# EAGLE board rbroce_board (EAGLE 9.5.2)
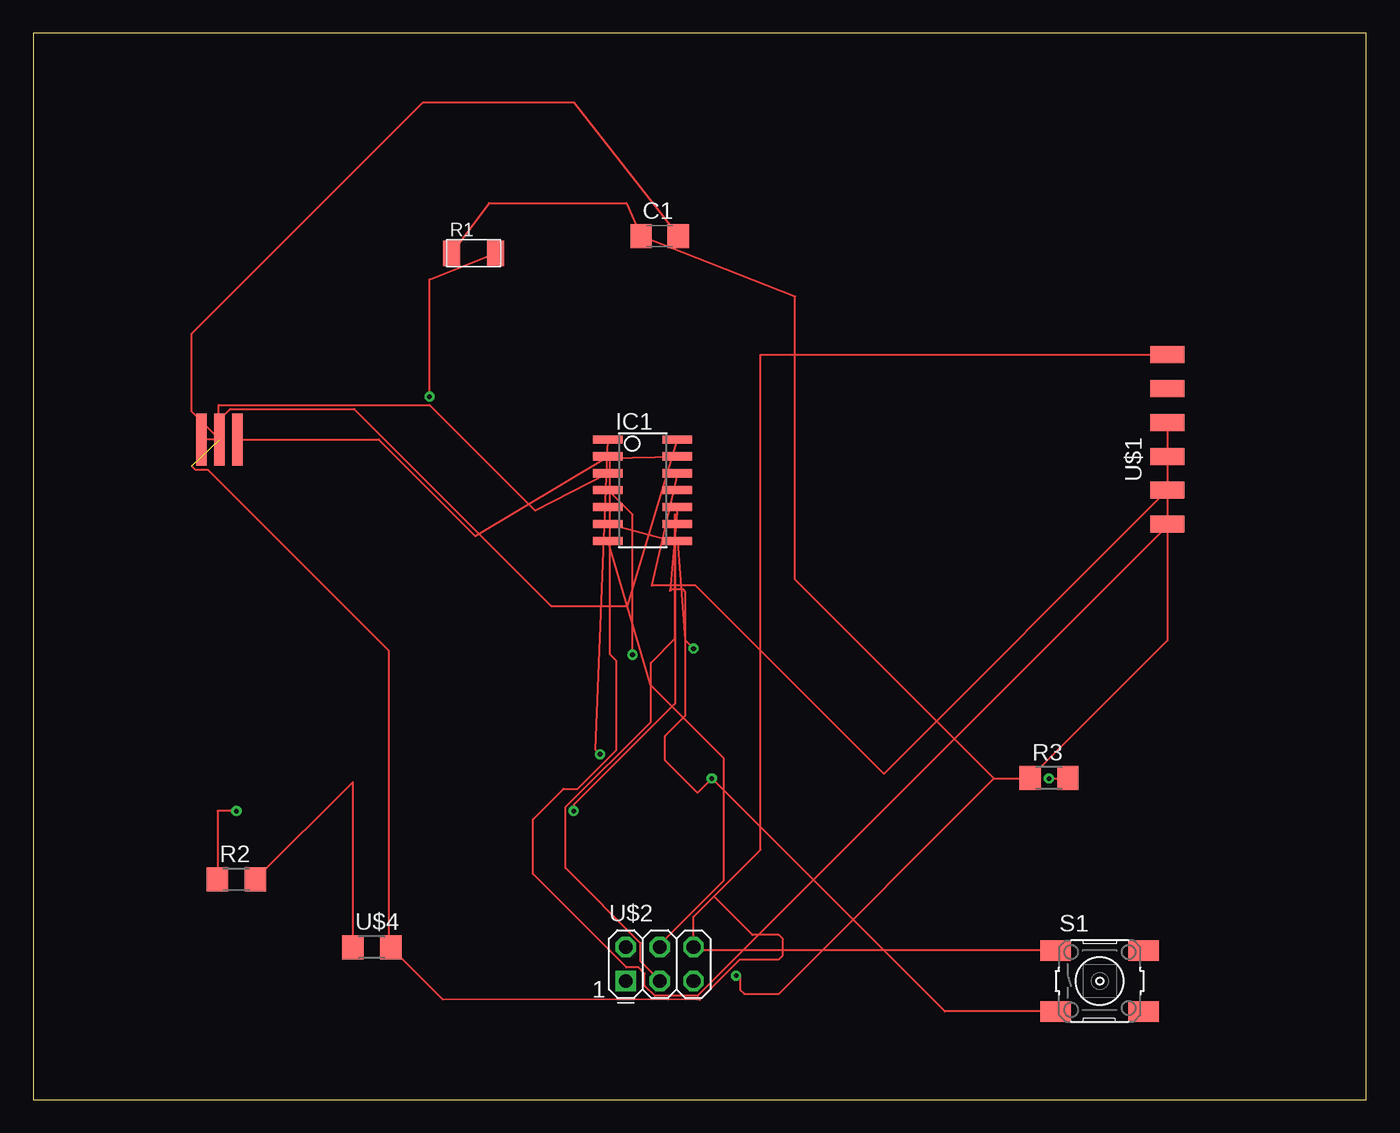
[diagram p0: board, top side]
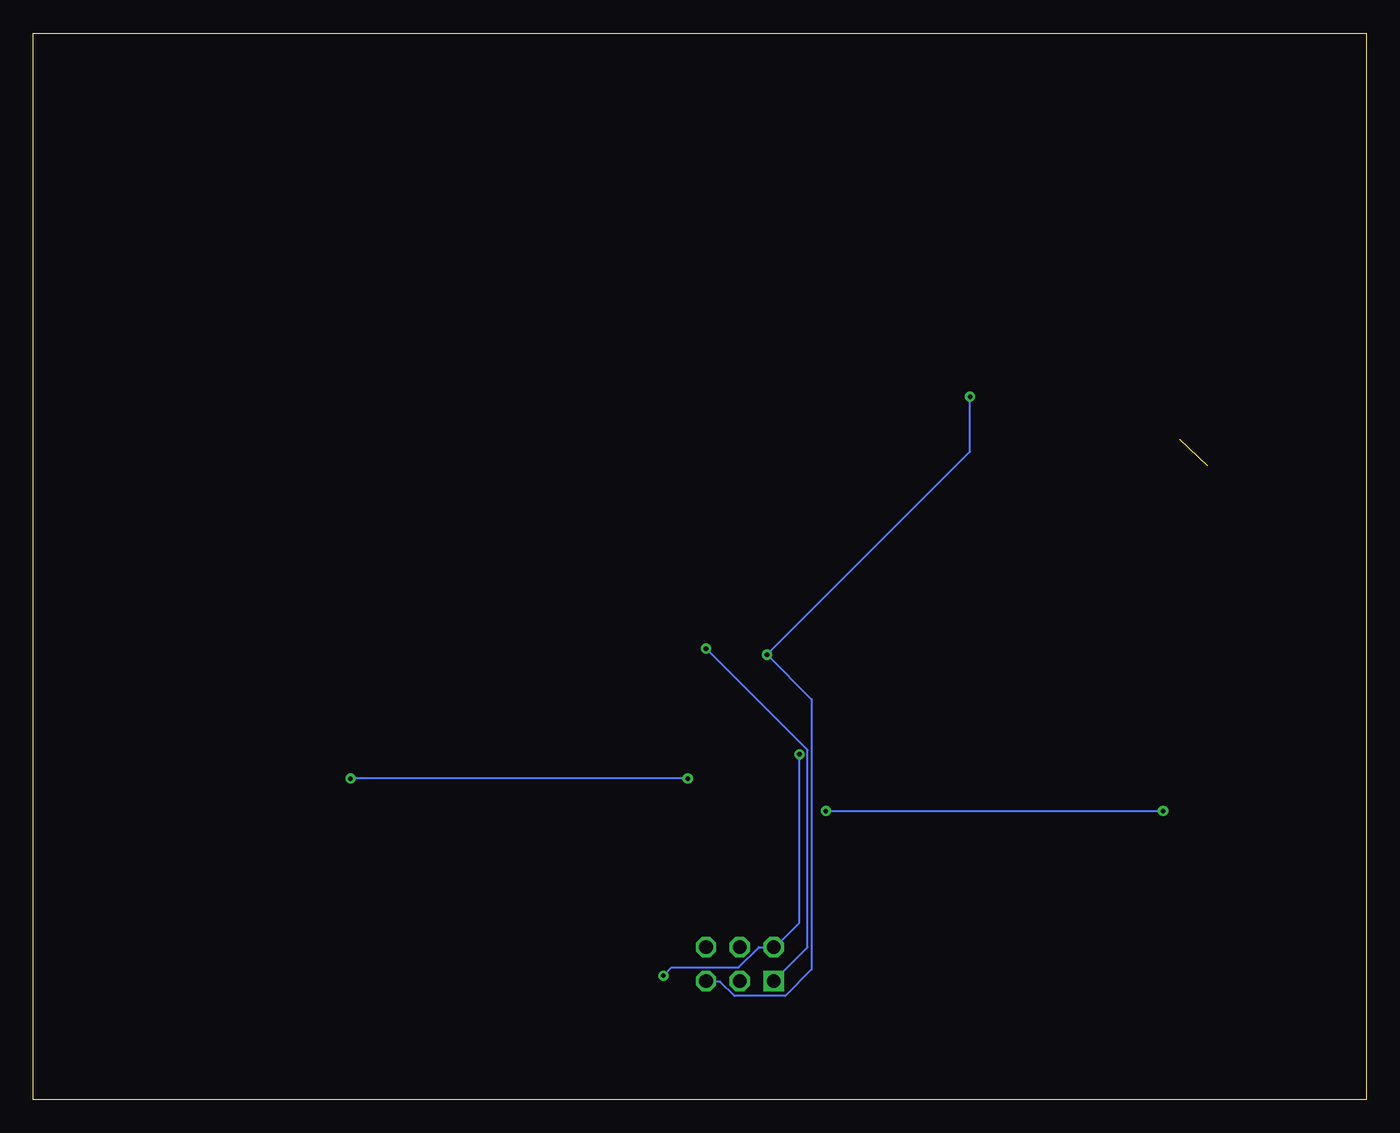
[diagram p1: board, bottom side, seen from below]

Size 100 x 80 mm. Coordinates in mm from the lower left corner, seen from the top.
Outline: 0,0 100,0 100,80 0,80 0,0
Copper layers (1*16): Top 0.035mm / dielectric 1.5mm / Bottom 0.035mm
Design rules "default": minimum track width 6mil, minimum drill 0.35mm, track to track 6mil, track to pad 6mil, pad to pad 6mil, via to via 6mil, smd to smd 6mil, copper to edge 40mil, drill to drill 6mil, minimum pad ring 10mil, minimum via ring 8mil, stop-mask expansion 4mil, vias tented up to drill 0mil, thermal gap 10mil

## Footprints (pad centres in the part's own frame; a part is rotated, then mirrored left to right if it is on the bottom)
C1206 = smd 1.6 x 1.8: 1 -1.4,0; 2 1.4,0
SOIC14 = smd 0.61 x 2.21: 1 -3.81,-2.603; 2 -2.54,-2.603; 3 -1.27,-2.603; 4 0,-2.603; 5 1.27,-2.603; 6 2.54,-2.603; 7 3.81,-2.603; 8 3.81,2.603; 9 2.54,2.603; 10 1.27,2.603; 11 0,2.603; 12 -1.27,2.603; 13 -2.54,2.603; 14 -3.81,2.603
R1206FAB = smd 1.27 x 1.905: 1 -1.651,0; 2 1.651,0
R1206 = smd 1.6 x 1.803: 1 -1.422,0; 2 1.422,0
6MM_SWITCH = smd 2.286 x 1.524: 1 -3.302,2.286; 2 3.302,2.286; 3 -3.302,-2.286; 4 3.302,-2.286
1X06SMD = smd 2.54 x 1.27: 1 0,6.35; 2 0,3.81; 3 0,1.27; 4 0,-1.27; 5 0,-3.81; 6 0,-6.35
2X03 = drill 1.016 square: 1 -2.54,-1.27 | drill 1.016 octagon: 2 -2.54,1.27; 3 0,-1.27; 4 0,1.27; 5 2.54,-1.27; 6 2.54,1.27
EFOBM = smd 0.8 x 3.9: 1 -1.35,0; 2 0,0; 3 1.35,0
LED1206 = smd 1.6 x 1.803: 1 -1.422,0; 2 1.422,0

## Placement (x,y rotation side)
C1  [C1206]  46.99,64.77 0 top
IC1  ATTINY44-SSU  [SOIC14]  45.72,45.72 270 top
R1  [R1206FAB]  33.02,63.5 0 top
R2  [R1206]  15.24,16.51 0 top
R3  [R1206]  76.2,24.13 0 top
S1  [6MM_SWITCH]  80.01,8.89 0 top
U$1  FTDI-SMD-HEADER  [1X06SMD]  85.09,49.53 0 top
U$2  AVRISP  [2X03]  46.99,10.16 0 top
U$3  RESONATOR  [EFOBM]  13.97,49.53 0 top
U$4  LED  [LED1206]  25.4,11.43 0 top

## Library data of the parts
C1 IC1 R1-R3 S1 U$1-U$4 = fab

## Nets
BUTTON: IC1.10 R3.2 S1.3
CTS: U$1.2
GND: C1.2 IC1.14 S1.1 U$1.1 U$2.6 U$3.2 U$4.2
LED: IC1.6 R2.1
MISO: IC1.8 U$2.1
MOSI: IC1.7 U$2.4
N$1: R2.2 U$4.1
PA2: IC1.11
PB0: IC1.2 U$3.3
PB1: IC1.3 U$3.1
PB2: IC1.5
RST: IC1.4 R1.2 U$2.5
RTS: U$1.6
RX: IC1.12 U$1.5
SCK: IC1.9 U$2.3
TX: IC1.13 U$1.4
VCC: C1.1 IC1.1 R1.1 R3.1 U$1.3 U$2.2

## Tracks (layer width: path | path; a pad name or v marks a point on that pad's centre or on a via)
BUTTON  (via drill 0.35)
  Top 0.152: v76.2,24.08 77.57,24.08 R3.2 | S1.3 68.38,6.6 v50.9,24.08 49.84,23.01 47.4,25.45 47.4,27.28 48.92,28.8 48.92,38.1 48.77,38.25 47.85,38.25 47.76,38.16 IC1.10
  Bottom 0.152: v50.9,24.08 v76.2,24.08
GND  (1 unrouted)
  Top 0.152: S1.1 49.53,11.18 U$2.6 49.53,13.72 51.05,15.24 | 51.05,15.24 54.56,18.75 54.56,55.88 U$1.1 | 11.89,47.55 12.19,47.24 13.11,47.24 26.67,33.68 26.67,11.48 U$4.2 30.71,7.51 49.99,7.47 53.03,10.52 55.93,10.52 56.24,10.82 56.24,12.04 55.93,12.34 53.95,12.34 51.05,15.24 | C1.2 40.55,74.83 29.26,74.83 11.89,57.45 11.89,51.61 U$3.2 14.02,49.53 14.02,51.05 14.78,51.82 24.08,51.82 38.86,37.03 44.58,37.03 IC1.14
LED  (via drill 0.35)
  Top 0.152: v15.24,21.64 13.82,21.64 R2.1 | v40.54,21.64 40.54,22.1 48.16,29.72 48.16,41.85 IC1.6
  Bottom 0.152: v40.54,21.64 v15.24,21.64
MISO  (via drill 0.35)
  Top 0.152: IC1.8 48.9,34.47 v49.53,33.83
  Bottom 0.152: v49.53,33.83 41.91,26.21 41.91,11.43 U$2.1
MOSI
  Top 0.152: IC1.7 46.32,31.1 51.82,25.6 51.82,16.46 47.09,11.73 47.09,11.43 U$2.4
N$1
  Top 0.152: U$4.1 23.98,23.83 R2.2
PB0
  Top 0.152: U$3.3 25.91,49.53 33.16,42.28 IC1.2
PB1
  Top 0.152: IC1.3 37.64,44.2 29.72,52.12 13.92,52.12 13.92,49.53 U$3.1
RST  (via drill 0.35)
  Top 0.152: v29.72,52.73 29.72,61.52 R1.2 | v44.96,33.38 44.96,43.88 IC1.4
  Bottom 0.152: v29.72,52.73 29.72,48.62 v44.96,33.38 41.6,30.02 41.6,9.75 43.59,7.77 47.4,7.77 48.46,8.84 49.53,8.84 U$2.5
RX
  Top 0.152: IC1.12 46.38,38.56 49.68,38.56 63.8,24.43 U$1.5
SCK
  Top 0.152: IC1.9 48.16,43.93 48.16,34.59 46.33,32.77 46.33,28.35 39.93,21.95 39.93,17.37 45.57,11.73 45.57,10.36 46.94,8.99 U$2.3
TX
  Top 0.152: U$1.4 85.09,43.03 49.84,7.77 46.63,7.77 45.87,8.53 45.87,9.45 45.41,9.91 44.5,9.91 37.49,16.92 37.49,21.03 39.78,23.32 40.84,23.32 43.74,26.21 43.74,32.92 43.28,33.38 43.28,48.12 IC1.13
VCC  (via drill 0.35)
  Top 0.152: R1.1 34.19,67.26 44.49,67.26 C1.1 57.15,60.25 57.15,39.01 72.08,24.08 | IC1.1 42.2,26.23 v42.52,25.91 | 72.08,24.08 74.68,24.08 R3.1 85.09,34.44 U$1.3 | 72.08,24.08 55.93,7.92 53.34,7.92 53.03,8.23 53.03,9.3 v52.73,9.3
  Bottom 0.152: v42.52,25.91 42.52,13.26 44.35,11.43 U$2.2 45.57,11.43 47.09,9.91 52.12,9.91 v52.73,9.3